# EAGLE board FEEDERLINK (EAGLE 9.5.2)
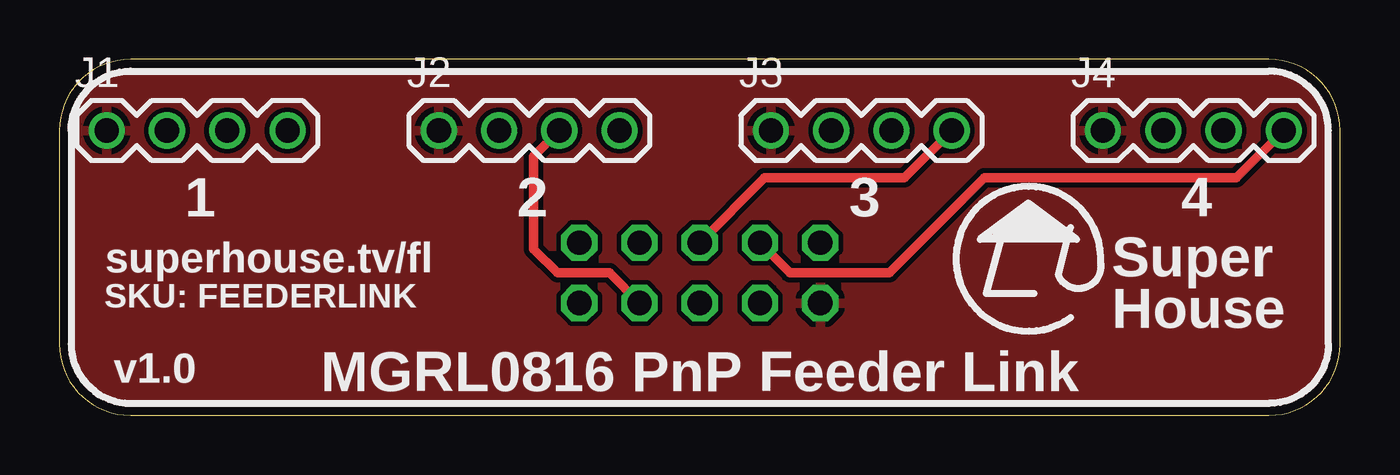
[diagram p0: board, top side]
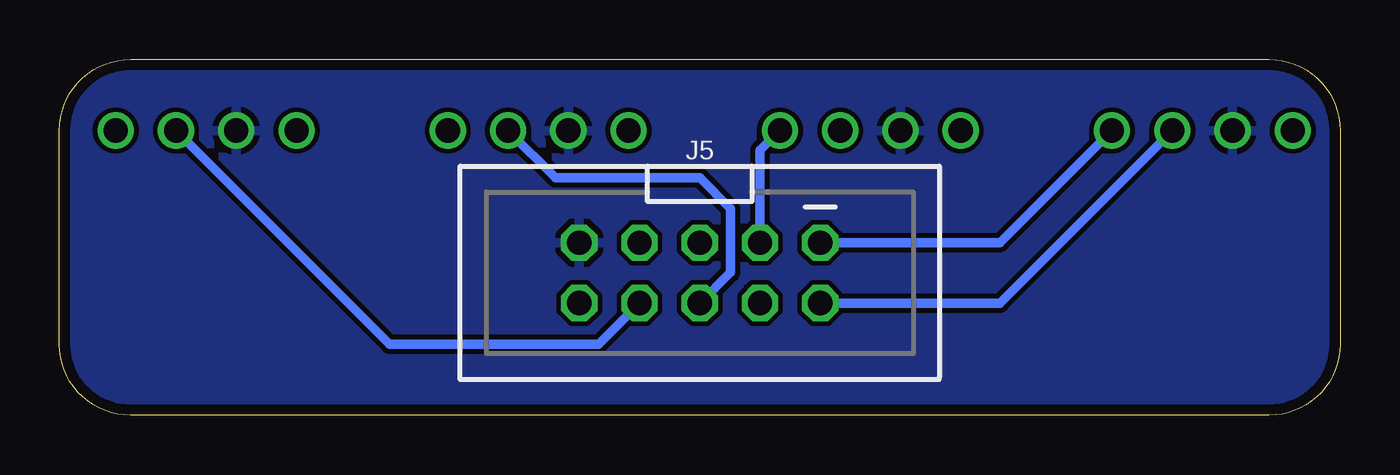
[diagram p1: board, bottom side, seen from below]

Size 54 x 15 mm. Coordinates in mm from the lower left corner, seen from the top.
Outline: 0,3 arc90 3,0 51,0 arc90 54,3 54,12 arc90 51,15 3,15 arc90 0,12 0,3
Copper layers (1*16): Top 0.035mm / dielectric 1.5mm / Bottom 0.035mm
Design rules "SuperHouse-Design-Rules": minimum track width 10mil, minimum drill 24mil, track to track 8mil, track to pad 8mil, pad to pad 8mil, via to via 8mil, smd to smd 6mil, copper to edge 18mil, drill to drill 8mil, minimum pad ring 10mil, minimum via ring 8mil, stop-mask expansion 4mil, vias tented up to drill 0.5mm, thermal gap 10mil

## Footprints (pad centres in the part's own frame; a part is rotated, then mirrored left to right if it is on the bottom)
1X04-S = drill 1.016: 1 0,0; 2 2.54,0; 3 5.08,0; 4 7.62,0
2X05-2.54-SHROUDED = drill 1.016 octagon: 1 -5.08,-1.27; 2 -5.08,1.27; 3 -2.54,-1.27; 4 -2.54,1.27; 5 0,-1.27; 6 0,1.27; 7 2.54,-1.27; 8 2.54,1.27; 9 5.08,-1.27; 10 5.08,1.27

## Placement (x,y rotation side)
J1  [1X04-S]  2,12 0 top
J2  [1X04-S]  16,12 0 top
J3  [1X04-S]  30,12 0 top
J4  [1X04-S]  44,12 0 top
J5  M02X5-SHROUDED  [2X05-2.54-SHROUDED]  27,6 180 bottom

## Library data of the parts
J1-J5 = SuperHouse-Connectors

## Nets
5V: J1.2 J2.2 J3.2 J4.2 J5.9
D0: J1.4 J5.1
D1: J1.3 J5.2
D2: J2.4 J5.3
D3: J2.3 J5.4
D4: J3.4 J5.5
D5: J3.3 J5.6
D6: J4.4 J5.7
D7: J4.3 J5.8
GND: J1.1 J2.1 J3.1 J4.1 J5.10

## Tracks (layer width: path | path; a pad name or v marks a point on that pad's centre or on a via)
5V
  pour Bottom: 0,12 arc-90 3,15 51,15 arc-90 54,12 54,3 arc-90 51,0 3,0 arc-90 0,3
D0
  Bottom 0.406: J1.4 14.35,7.27 J5.1
D1
  Bottom 0.406: J1.3 14.35,4.73 J5.2
D2
  Bottom 0.406: J5.3 24.46,11.16 J2.4
D3
  Top 0.406: J5.4 23.19,6 21,6 20,7 20,10.92 J2.3
D4
  Top 0.406: J3.4 35.62,10 29.73,10 J5.5
D5
  Bottom 0.406: J3.3 33.08,10 27,10 25.7,8.7 25.7,6.03 J5.6
D6
  Top 0.406: J5.7 30.81,6 35,6 39,10 49.62,10 J4.4
D7
  Bottom 0.406: J5.8 31.27,3 40.08,3 J4.3
GND
  pour Top: 0,12 arc-90 3,15 51,15 arc-90 54,12 54,3 arc-90 51,0 3,0 arc-90 0,3

## Text on the board
tPlace: 1 | 2 | 3 | 4 | superhouse.tv/fl | SKU: FEEDERLINK | Super / House | v1.0 | MGRL0816 PnP Feeder Link